# Altium PCB KNX_MCU_8CH_V1.2.PcbDoc
Units mm, origin at the board's own origin, x right, y up, seen from the top; angles counter-clockwise.
Board outline 96.5 x 64.4 mm, 2 copper layers (F.Cu, B.Cu), stack 1.581 mm thick; 102 components, 107 nets, 347 pads, 212 vias.
Unrouted connection lines stored in the file: 62.
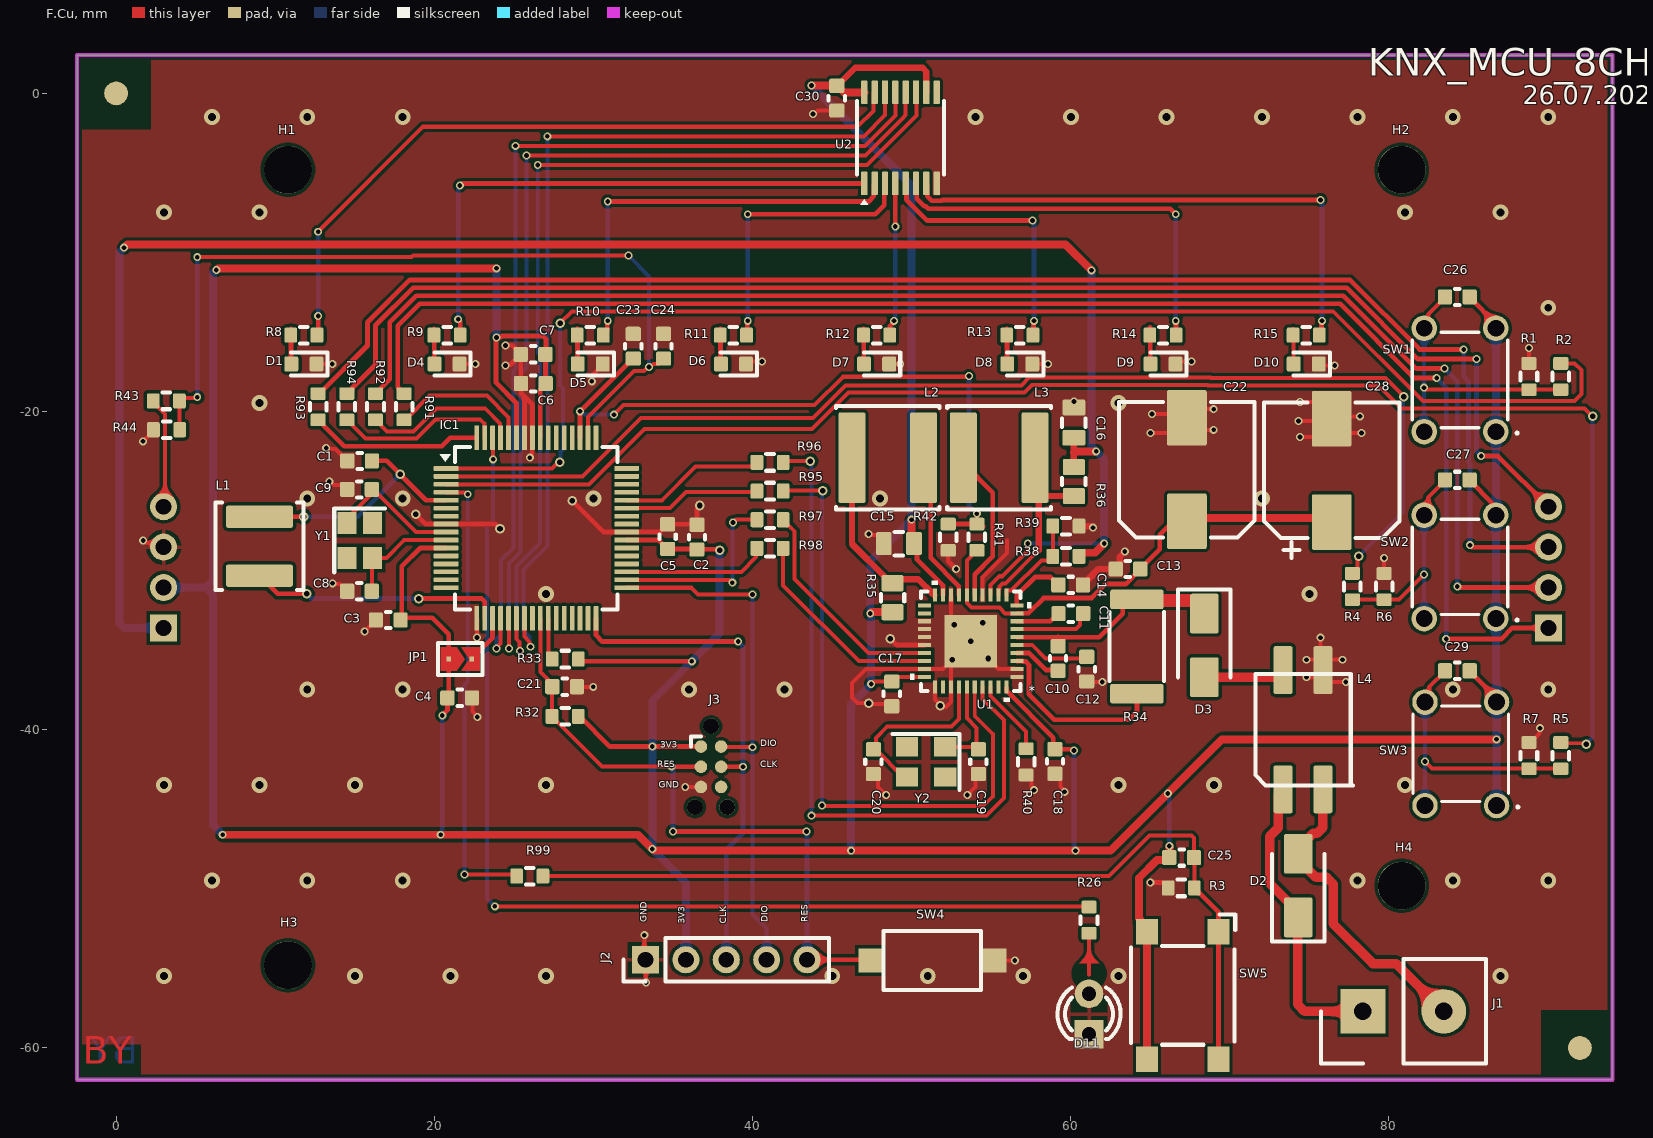
[diagram p0: F.Cu view]
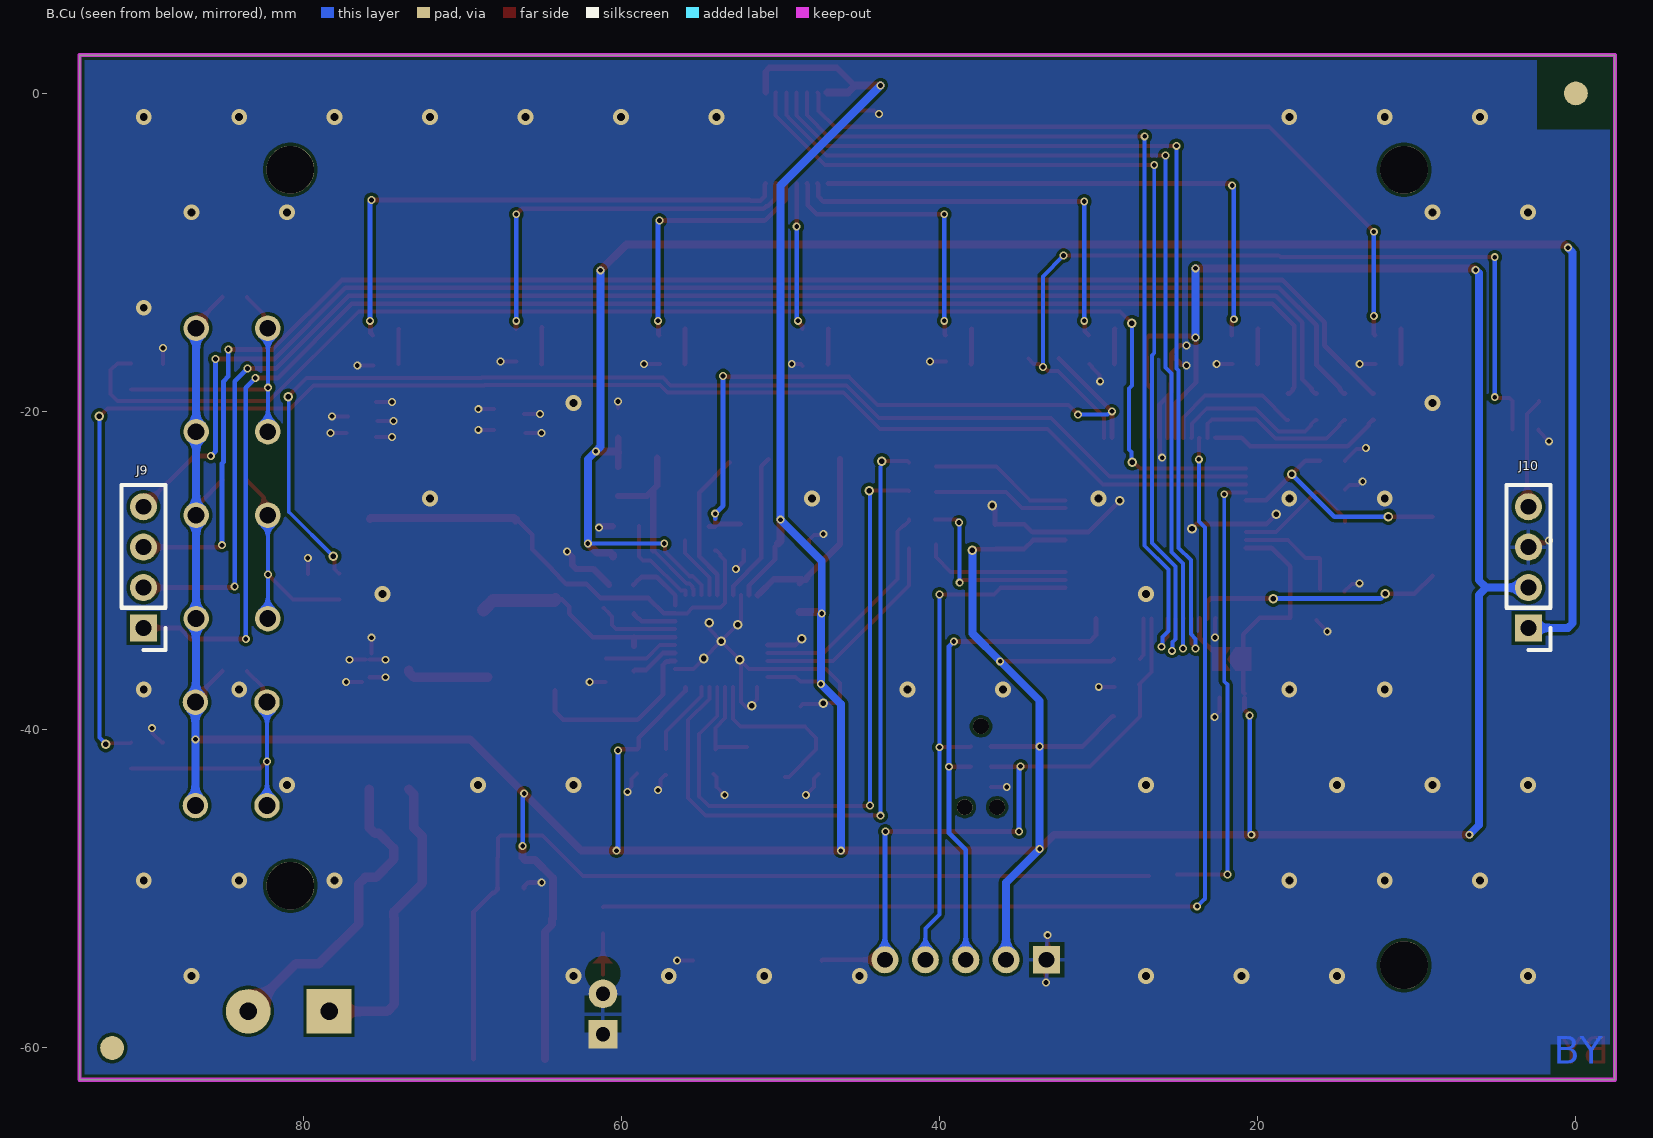
[diagram p1: B.Cu view, seen from below]

## Layer stack, top to bottom
F.Mask: solder mask 0.0102, Solder Resist, Dk 3.5
F.Cu: signal copper 0.0356
Dielectric 1: dielectric 1.51, FR-4, Dk 4.8
B.Cu: signal copper 0.0356
B.Mask: solder mask 0.0102, Solder Resist, Dk 3.5

## Board outline
-2.45,-62 -2.45,2.4 94.05,2.4 94.05,-62

## Design rules (kind name [scope] priority, off if disabled: settings)
Clearance "Clearence 0,5_Polygon" [InNamedPolygon('F.Cu--2') OR InNamedPolygon('B.Cu--2') OR InNamedPolygon('F.Cu--3') OR InNamedPolygon('B.Cu--3')] p1: gap=0.5 ignorepadtopadclearanceinfootprint=FALSE
Clearance "Clearence 0,4_Polygon" [InNamedPolygon('F.Cu--1') OR InNamedPolygon('B.Cu--1')] p2: gap=0.4 ignorepadtopadclearanceinfootprint=FALSE
Clearance "Clearence 0,3_Polygon" [InNamedPolygon('F.Cu-') OR InNamedPolygon('B.Cu-')] p3: gap=0.3 ignorepadtopadclearanceinfootprint=FALSE
Clearance [All] p4: gap=0.2 ignorepadtopadclearanceinfootprint=TRUE
ComponentClearance [All] p1: gap=0 collisioncheckmode=3 verticalgap=0.01 showdistances=FALSE
MinimumSolderMaskSliver [All] p1: minsoldermaskwidth=0
PolygonConnect [All] p1: thpad.connectstyle=Relief thpad.reliefconductorwidth=0.254 thpad.reliefentries=4 thpad.polygonreliefangle="90 Angle" thpad.airgapwidth=0.254 smdpad.connectstyle=Direct smdpad.reliefconductorwidth=0.254 smdpad.reliefentries=4 smdpad.polygonreliefangle="90 Angle" smdpad.airgapwidth=0.254 via.connectstyle=Direct via.reliefconductorwidth=0.254 via.reliefentries=4 via.polygonreliefangle="90 Angle" via.airgapwidth=0.254
PolygonConnect Polygon_B.Cu--3_ConnectRelief90 [IsNamedPolygon('B.Cu--3') vs (IsThruPin or IsSMTPin) and (PadShape_AllLayers <> 'Round')] p2 off: connectstyle=Relief reliefconductorwidth=0.4 reliefentries=4 polygonreliefangle="90 Angle" airgapwidth=0.4
PolygonConnect Polygon_F.Cu--3_ConnectRelief45 [IsNamedPolygon('F.Cu--3') vs (IsThruPin or IsSMTPin) and (PadShape_AllLayers = 'Round')] p3 off: connectstyle=Relief reliefconductorwidth=0.4 reliefentries=4 polygonreliefangle="45 Angle" airgapwidth=0.4
PolygonConnect Polygon_B.Cu--2_ConnectDirect [IsNamedPolygon('B.Cu--2') vs IsVia] p4 off: connectstyle=Direct reliefconductorwidth=0.254 reliefentries=4 polygonreliefangle="90 Angle" airgapwidth=0.254
PolygonConnect Polygon_B.Cu--2_ConnectRelief45 [IsNamedPolygon('B.Cu--2') vs (IsThruPin or IsSMTPin) and (PadShape_AllLayers = 'Round')] p5 off: connectstyle=Relief reliefconductorwidth=0.4 reliefentries=4 polygonreliefangle="45 Angle" airgapwidth=0.4
PolygonConnect Polygon_B.Cu--2_ConnectRelief90 [IsNamedPolygon('B.Cu--2') vs (IsThruPin or IsSMTPin) and (PadShape_AllLayers <> 'Round')] p6 off: connectstyle=Relief reliefconductorwidth=0.4 reliefentries=4 polygonreliefangle="90 Angle" airgapwidth=0.4
PolygonConnect Polygon_F.Cu--2_ConnectDirect [IsNamedPolygon('F.Cu--2') vs IsVia] p7 off: connectstyle=Direct reliefconductorwidth=0.254 reliefentries=4 polygonreliefangle="90 Angle" airgapwidth=0.254
PolygonConnect Polygon_F.Cu--2_ConnectRelief45 [IsNamedPolygon('F.Cu--2') vs (IsThruPin or IsSMTPin) and (PadShape_AllLayers = 'Round')] p8 off: connectstyle=Relief reliefconductorwidth=0.4 reliefentries=4 polygonreliefangle="45 Angle" airgapwidth=0.4
PolygonConnect Polygon_F.Cu--2_ConnectRelief90 [IsNamedPolygon('F.Cu--2') vs (IsThruPin or IsSMTPin) and (PadShape_AllLayers <> 'Round')] p9 off: connectstyle=Relief reliefconductorwidth=0.4 reliefentries=4 polygonreliefangle="90 Angle" airgapwidth=0.4
PolygonConnect Polygon_B.Cu--1_ConnectDirect [IsNamedPolygon('B.Cu--1') vs IsVia] p10 off: connectstyle=Direct reliefconductorwidth=0.254 reliefentries=4 polygonreliefangle="90 Angle" airgapwidth=0.254
PolygonConnect Polygon_B.Cu--1_ConnectRelief45 [IsNamedPolygon('B.Cu--1') vs (IsThruPin or IsSMTPin) and (PadShape_AllLayers = 'Round')] p11 off: connectstyle=Relief reliefconductorwidth=0.4 reliefentries=4 polygonreliefangle="45 Angle" airgapwidth=0.4
PolygonConnect Polygon_B.Cu--1_ConnectRelief90 [IsNamedPolygon('B.Cu--1') vs (IsThruPin or IsSMTPin) and (PadShape_AllLayers <> 'Round')] p12 off: connectstyle=Relief reliefconductorwidth=0.4 reliefentries=4 polygonreliefangle="90 Angle" airgapwidth=0.4
PolygonConnect Polygon_F.Cu--1_ConnectDirect [IsNamedPolygon('F.Cu--1') vs IsVia] p13 off: connectstyle=Direct reliefconductorwidth=0.254 reliefentries=4 polygonreliefangle="90 Angle" airgapwidth=0.254
PolygonConnect Polygon_F.Cu--1_ConnectRelief45 [IsNamedPolygon('F.Cu--1') vs (IsThruPin or IsSMTPin) and (PadShape_AllLayers = 'Round')] p14 off: connectstyle=Relief reliefconductorwidth=0.4 reliefentries=4 polygonreliefangle="45 Angle" airgapwidth=0.4
PolygonConnect Polygon_F.Cu--1_ConnectRelief90 [IsNamedPolygon('F.Cu--1') vs (IsThruPin or IsSMTPin) and (PadShape_AllLayers <> 'Round')] p15 off: connectstyle=Relief reliefconductorwidth=0.4 reliefentries=4 polygonreliefangle="90 Angle" airgapwidth=0.4
PolygonConnect Polygon_B.Cu-_ConnectDirect [IsNamedPolygon('B.Cu-') vs IsVia] p16 off: connectstyle=Direct reliefconductorwidth=0.254 reliefentries=4 polygonreliefangle="90 Angle" airgapwidth=0.254
PolygonConnect Polygon_B.Cu-_ConnectRelief45 [IsNamedPolygon('B.Cu-') vs (IsThruPin or IsSMTPin) and (PadShape_AllLayers = 'Round')] p17 off: connectstyle=Relief reliefconductorwidth=0.3 reliefentries=4 polygonreliefangle="45 Angle" airgapwidth=0.3
PolygonConnect Polygon_B.Cu-_ConnectRelief90 [IsNamedPolygon('B.Cu-') vs (IsThruPin or IsSMTPin) and (PadShape_AllLayers <> 'Round')] p18 off: connectstyle=Relief reliefconductorwidth=0.3 reliefentries=4 polygonreliefangle="90 Angle" airgapwidth=0.3
PolygonConnect Polygon_F.Cu-_ConnectDirect [IsNamedPolygon('F.Cu-') vs IsVia] p19 off: connectstyle=Direct reliefconductorwidth=0.254 reliefentries=4 polygonreliefangle="90 Angle" airgapwidth=0.254
PolygonConnect Polygon_F.Cu-_ConnectRelief45 [IsNamedPolygon('F.Cu-') vs (IsThruPin or IsSMTPin) and (PadShape_AllLayers = 'Round')] p20 off: connectstyle=Relief reliefconductorwidth=0.3 reliefentries=4 polygonreliefangle="45 Angle" airgapwidth=0.3
RoutingVias [All] p1: holewidth=0.711 width=1.27 viastyle="Through Hole" minholewidth=0.711 minwidth=1.27 maxholewidth=0.711 maxwidth=1.27
SilkToSilkClearance [All] p1: silktosilkclearance=0
SilkToSolderMaskClearance [IsPad] p1: minsilkscreentomaskgap=0 clearancetoexposedcopper=TRUE
SolderMaskExpansion [All] p1: expansion=0 istentingtop=FALSE
SupplyNets "Schematic Supply Nets_3" [InNet('+3V3')] p1: voltage=0.000
SupplyNets "Schematic Supply Nets_2" [InNet('GND')] p2: voltage=0.000
SupplyNets "Schematic Supply Nets" [InNet('+12V')] p3: voltage=0.000
Width [All] p1: maxlimit=10 minlimit=0.2 preferedwidth=0.254 minimp=50.000000 maximp=50.000000 favimp=50.000000
26 further rules are at their usual default settings.

## Classes and differential pairs
component class UI_BUTTON_LED: C26 C27 C29 C30 D1 D4 D5 D6 D7 D8 D9 D10 R1 R2 R4 R5 R6 R7 R8 R9 R10 R11 R12 R13 R14 R15 SW1 SW2 SW3 U2
component class "Transceiver for KNx": C10 C11 C12 C13 C14 C15 C16 C17 C18 C19 C20 C22 C28 D2 D3 L2 L3 L4 R34 R35 R36 R38 R39 R40 U1 Y2
component class MCU: C1 C2 C3 C4 C5 C6 C7 C8 C9 C21 IC1 JP1 L1 R32 R33 SW4 Y1
component class KNX-MCU-CONTROL_V0.2: C23 C24 C25 D11 H1 H2 H3 H4 J1 J2 J3 R3 R26 R41 R42 R43 R44 R95 R96 R97 R98 R99 SW5
component class Connectors: J9 J10 R91 R92 R93 R94

## Components (designator, comment, footprint, x,y, rotation, side; value= is the part's Value field where it differs from the comment)
C1 "4.7uF" C_0603_1608METRIC 15.3,-23.1 r0 top
C2 "1uF" C_0603_1608METRIC 36.508,-27.887 r270 top
C3 "100nF" C_0603_1608METRIC 17.1,-33.1 r0 top
C4 "100nF" C_0603_1608METRIC 21.6,-38 r180 top
C5 "100nF" C_0603_1608METRIC 34.668,-27.857 r270 top
C6 "100nF" C_0603_1608METRIC 26.218,-18.237 r0 top
C7 "2.2uF" C_0603_1608METRIC 26.2,-16.4 r0 top
C8 "15pF" C_0603_1608METRIC 15.3,-31.3 r180 top
C9 "15pF" C_0603_1608METRIC 15.3,-24.9 r180 top
C10 "47nF" C_0603_1608METRIC 59.2,-35.525 r90 top
C11 "220nF" C_0603_1608METRIC 60,-32.7 r0 top
C12 "100nF" C_0603_1608METRIC 61,-36.2 r90 top
C13 "100nF" C_0603_1608METRIC 63.6,-29.9 r180 top
C14 "1uF" C_0603_1608METRIC 60,-30.9 r180 top
C15 "10uF" C_0805_2012Metric 49.2,-28.3 r0 top
C16 "10uF" C_0805_2012Metric 60.2,-20.7 r270 top
C17 "100nF" C_0603_1608METRIC 48.747,-37.752 r90 top
C18 "100nF" C_0603_1608METRIC 59,-42 r90 top
C19 "10pF" C_0603_1608METRIC 54.2,-42 r270 top
C20 "10pF" C_0603_1608METRIC 47.6,-42 r270 top
C21 "100nF" C_0603_1608METRIC 28.2,-37.3 r180 top
C22 "100uF" CP_Elec_8x10#1 67.3,-23.65 r90 top
C23 "100nF" C_0603_1608METRIC 32.5,-15.9 r90 top
C24 "100nF" C_0603_1608METRIC 34.4,-15.9 r90 top
C25 "100nF" C_0603_1608METRIC 66.972,-48.043 r180 top
C26 "100nF" C_0603_1608METRIC 84.3,-12.8 r180 top
C27 "100nF" C_0603_1608METRIC 84.3,-24.3 r180 top
C28 "470uf/16V" CP_Elec_8x10#2 76.4,-23.7 r270 top
C29 "100nF" C_0603_1608METRIC 84.3,-36.3 r180 top
C30 "100nF" C_0603_1608METRIC 45.3,-0.3 r270 top
D1 "LED" LED_0603_1608METRIC 11.8,-17.013 r180 top
D2 "SMAJ40CA-HT" D_SMA 74.3,-49.8 r90 top
D3 "SS28" D_SMA 68.4,-34.7 r270 top
D4 "LED" LED_0603_1608METRIC 20.8,-17.013 r180 top
D5 "LED" LED_0603_1608METRIC 29.8,-17.013 r180 top
D6 "LED" LED_0603_1608METRIC 38.8,-17.013 r180 top
D7 "LED" LED_0603_1608METRIC 47.8,-17.013 r180 top
D8 "LED" LED_0603_1608METRIC 56.8,-17.013 r180 top
D9 "LED" LED_0603_1608METRIC 65.8,-17.013 r180 top
D10 "LED" LED_0603_1608METRIC 74.8,-17.013 r180 top
D11 "Led_Green" LED_D3.0MM 61.15,-57.87 r90 top locked
H1 "MountingHole" MOUNTINGHOLE_3MM 10.8,-4.8 r270 top
H2 "MountingHole" MOUNTINGHOLE_3MM 80.8,-4.8 r270 top
H3 "MountingHole" MOUNTINGHOLE_3MM 10.8,-54.8 r270 top
H4 "MountingHole" MOUNTINGHOLE_3MM 80.8,-49.8 r270 top
IC1 "R7FA2L1AB3CFM" LQFP-64_10X10MM_P0.5MM 26.413,-27.327 r0 top locked
J1 "L-KLS8-2170-13" SAMTEC_HPM-02-01-X-S_STRAIGHT_1X02_PITCH5.08MM 78.37,-57.7 r90 top locked
J2 "Conn_01x05" PinHeader_1x05_P2.54mm_Vertical 33.268,-54.457 r90 top
J3 "Conn_ARM_SWD_TagConnect_TC2030-NL" Tag-Connect_TC2030-IDC-NL_2x03_P1.27mm_Vertical 37.393,-42.327 r270 top
J9 "Conn_01x04" PINHEADER_1X04_P2.54MM_VERTICAL 90.036,-33.604 r0 bottom locked
J10 "Conn_01x04" PINHEADER_1X04_P2.54MM_VERTICAL 2.986,-33.604 r0 bottom locked
JP1 "SolderJumper_2_Open" SolderJumper-2_P1.3mm_Open_TrianglePad1.0x1.5mm 21.628,-35.557 r0 top
L1 "4.7uH" L_APV_ANR5012 9.008,-28.467 r270 top
L2 "220uH" L_APV_ANR6028 48.5,-22.9 r180 top
L3 "220uH" L_APV_ANR6028 55.5,-22.9 r0 top
L4 "50474C" L_CommonMode_50474C_7.5x5.9mm 74.6,-40 r90 top
R1 "10k" R_0603_1608METRIC 88.8,-17.8 r90 top
R2 "330R" R_0603_1608METRIC 90.8,-17.8 r270 top
R3 "10K" R_0603_1608METRIC 66.947,-49.943 r0 top
R4 "330R" R_0603_1608METRIC 77.7,-31 r270 top
R5 "330R" R_0603_1608METRIC 90.8,-41.625 r270 top
R6 "10k" R_0603_1608METRIC 79.7,-31 r90 top
R7 "10k" R_0603_1608METRIC 88.8,-41.625 r90 top
R8 "1k" R_0603_1608METRIC 11.8,-15.2 r180 top
R9 "1k" R_0603_1608METRIC 20.8,-15.2 r180 top
R10 "1k" R_0603_1608METRIC 29.8,-15.2 r180 top
R11 "1k" R_0603_1608METRIC 38.8,-15.2 r180 top
R12 "1k" R_0603_1608METRIC 47.8,-15.2 r180 top
R13 "1k" R_0603_1608METRIC 56.8,-15.2 r180 top
R14 "1k" R_0603_1608METRIC 65.8,-15.2 r180 top
R15 "1k" R_0603_1608METRIC 74.8,-15.2 r180 top
R26 "1K" R_0603_1608METRIC 61.15,-51.97 r270 top
R32 "10K" R_0603_1608METRIC 28.218,-39.157 r0 top
R33 "10K" R_0603_1608METRIC 28.228,-35.557 r0 top
R34 "27R" R_2512_6332Metric 64.157,-34.772 r270 top
R35 "1R" R_0805_2012Metric 48.8,-31.7 r270 top
R36 "1R" R_0805_2012Metric 60.2,-24.4 r90 top
R38 "91K" R_0603_1608METRIC 59.7,-29.1 r180 top
R39 "10K" R_0603_1608METRIC 59.7,-27.2 r0 top
R40 "20k" R_0603_1608METRIC 57.197,-42.022 r90 top
R41 "220k" R_0603_1608METRIC 54.1,-27.9 r90 top
R42 "27k" R_0603_1608METRIC 52.3,-27.9 r270 top
R43 "100k" R_0603_1608METRIC 3.152,-19.333 r0 top
R44 "27k" R_0603_1608METRIC 3.172,-21.143 r180 top
R91 "33R" R_0603_1608METRIC 18.1,-19.7 r90 top
R92 "33R" R_0603_1608METRIC 16.3,-19.7 r90 top
R93 "33R" R_0603_1608METRIC 12.7,-19.7 r90 top
R94 "33R" R_0603_1608METRIC 14.5,-19.7 r90 top
R95 "33R" R_0603_1608METRIC 41.1,-25 r180 top
R96 "33R" R_0603_1608METRIC 41.1,-23.2 r180 top
R97 "33R" R_0603_1608METRIC 41.1,-26.8 r180 top
R98 "33R" R_0603_1608METRIC 41.1,-28.6 r180 top
R99 "330R" R_0603_1608METRIC 26,-49.2 r180 top
SW1 "TL1105BF160Q" TL1105 84.468,-18.017 r90 top locked
SW2 "TL1105BF160Q" TL1105 84.468,-29.767 r90 top locked
SW3 "TL1105BF160Q" TL1105 84.518,-41.517 r90 top locked
SW4 "SW_Push" SW_SPST_CK_RS282G05A3 51.3,-54.5 r0 top
SW5 "SW_Push" SW_SPST_OMRON_B3FS-100XP 67.04,-56.7 r270 top locked
U1 "NCN5130MNTWG" QFN40_485AU-01_ONS 53.717,-34.432 r180 top locked
U2 "74HC595PW,118" TSSOP-16_4.4X5MM_P0.65MM 49.3,-2.8 r90 top
Y1 "20Mhz" Crystal_SMD_SeikoEpson_FA238-4Pin_3.2x2.5mm 15.308,-28.102 r270 top
Y2 "16Mhz" Crystal_SMD_SeikoEpson_FA238V-4Pin_3.2x2.5mm 50.907,-42.022 r180 top

## Footprints (in the part's own frame and the unit in brackets; to place one, negate y for a bottom-side part, rotate by r counter-clockwise, add the part's x,y. Pads: shape width x height; smd on the part's side, far side on the other; paste and mask are expansions set on the pad)
C_0603_1608METRIC [mm]
  rrect25% 0.9x0.95 smd mask+0.05: 1(-0.771,-0.005) 2(0.779,-0.005)
  silkscreen extent -0.14,-0.52 0.14,0.5
C_0805_2012Metric [mm]
  rrect25% 1x1.45 smd mask+0.05: 1(-0.95,0) 2(0.95,0)
  silkscreen extent -0.26,-0.73 0.26,0.73
CP_Elec_8x10#1 [mm]
  rrect10% 3.5x2.5 smd mask+0.05: 1(-3.25,0) 2(3.25,0)
  silkscreen extent -4.26,-4.26 4.26,4.26
CP_Elec_8x10#2 [mm]
  rrect10% 3.5x2.5 smd mask+0.05: 1(3.25,0) 2(-3.25,0)
  silkscreen extent -4.26,-4.26 5.5,4.26
Crystal_SMD_SeikoEpson_FA238-4Pin_3.2x2.5mm [mm]
  rect 1.4x1.2 smd mask+0.05: 1(-1.1,-0.8) 2(1.1,0.8) 3(1.1,-0.8) 4(-1.1,0.8)
  silkscreen extent -2,-1.6 2,1.6
Crystal_SMD_SeikoEpson_FA238V-4Pin_3.2x2.5mm [mm]
  rect 1.4x1.2 smd mask+0.05: 1(-1.2,-0.95) 2(1.2,-0.95) 3(1.2,0.95) 4(-1.2,0.95)
  silkscreen extent -2.1,-1.75 2.1,1.75
D_SMA [mm]
  rrect14% 2.5x1.8 smd mask+0.05: 1(-2,0) 2(2,0)
  silkscreen extent -3.51,-1.65 2,1.65
L_APV_ANR5012 [mm]
  rrect18% 1.4x4.2 smd mask+0.05: 1(-1.85,0) 2(1.85,0)
  silkscreen extent -2.76,-2.76 2.76,2.76
L_APV_ANR6028 [mm]
  rrect15% 1.7x5.7 smd mask+0.05: 1(-2.25,0) 2(2.25,0)
  silkscreen extent -3.26,-3.26 3.26,3.26
L_CommonMode_50474C_7.5x5.9mm [mm]
  rrect20% 3x1.2 smd mask+0.05: 1(-3.75,1.25) 2(-3.75,-1.25) 3(3.75,-1.25) 4(3.75,1.25)
  silkscreen extent -3.5,-3.14 3.5,3
LED_0603_1608METRIC [mm]
  rrect25% 0.875x0.95 smd mask+0.05: 1(-0.787,0) 2(0.787,0)
  silkscreen extent -1.49,-0.73 0.8,0.73, body extent -0.86,-0.4 0.74,0.4, height 0.6
LED_D3.0MM [mm]
  rect 1.8x1.8 hole 0.9 mask+0.05: 1(-1.27,0)
  round 1.8 hole 0.9 mask+0.05: 2(1.27,0)
  silkscreen extent -1.56,-1.99 1.67,1.99, body extent -1.6,-1.6 1.6,1.6, height 13
LQFP-64_10X10MM_P0.5MM [mm]
  rrect25% 1.55x0.3 smd mask+0.05: 1(-5.675,3.75) 2(-5.675,3.25) 3(-5.675,2.75) 4(-5.675,2.25) 5(-5.675,1.75) 6(-5.675,1.25) 7(-5.675,0.75) 8(-5.675,0.25) 9(-5.675,-0.25) 10(-5.675,-0.75) 11(-5.675,-1.25) 12(-5.675,-1.75) 13(-5.675,-2.25) 14(-5.675,-2.75) 15(-5.675,-3.25) 16(-5.675,-3.75) 33(5.675,-3.75) 34(5.675,-3.25) 35(5.675,-2.75) 36(5.675,-2.25) 37(5.675,-1.75) 38(5.675,-1.25) 39(5.675,-0.75) 40(5.675,-0.25) 41(5.675,0.25) 42(5.675,0.75) 43(5.675,1.25) 44(5.675,1.75) 45(5.675,2.25) 46(5.675,2.75) 47(5.675,3.25) 48(5.675,3.75)
  rrect25% 0.3x1.55 smd mask+0.05: 17(-3.75,-5.675) 18(-3.25,-5.675) 19(-2.75,-5.675) 20(-2.25,-5.675) 21(-1.75,-5.675) 22(-1.25,-5.675) 23(-0.75,-5.675) 24(-0.25,-5.675) 25(0.25,-5.675) 26(0.75,-5.675) 27(1.25,-5.675) 28(1.75,-5.675) 29(2.25,-5.675) 30(2.75,-5.675) 31(3.25,-5.675) 32(3.75,-5.675) 49(3.75,5.675) 50(3.25,5.675) 51(2.75,5.675) 52(2.25,5.675) 53(1.75,5.675) 54(1.25,5.675) 55(0.75,5.675) 56(0.25,5.675) 57(-0.25,5.675) 58(-0.75,5.675) 59(-1.25,5.675) 60(-1.75,5.675) 61(-2.25,5.675) 62(-2.75,5.675) 63(-3.25,5.675) 64(-3.75,5.675)
  silkscreen extent -6.06,-5.11 5.11,5.11, body extent -6,-6 6,6, height 1.7
MOUNTINGHOLE_3MM [mm]
  round 3 hole 3 mask+0.05: Un1(0,0)
PINHEADER_1X04_P2.54MM_VERTICAL [mm]
  rect 1.7x1.7 hole 1 mask+0.05: 1(0,0)
  round 1.7 hole 1 mask+0.05: 2(0,-2.54) 3(0,-5.08) 4(0,-7.62)
  silkscreen extent -1.38,-9 1.38,1.38, body extent -1.27,-8.98 1.27,1.31, height 15.75
PinHeader_1x05_P2.54mm_Vertical [mm]
  rect 1.7x1.7 hole 1 mask+0.05: 1(0,0)
  round 1.7 hole 1 mask+0.05: 2(0,-2.54) 3(0,-5.08) 4(0,-7.62) 5(0,-10.16)
  silkscreen extent -1.38,-11.54 1.38,1.38
QFN40_485AU-01_ONS [mil]
  rect 32x10 smd mask+1.97: 1(-114,88.58) 2(-114,68.9) 3(-114,49.21) 4(-114,29.53) 5(-114,9.84) 6(-114,-9.84) 7(-114,-29.53) 8(-114,-49.21) 9(-114,-68.9) 10(-114,-88.58) 21(114,-88.58) 22(114,-68.9) 23(114,-49.21) 24(114,-29.53) 25(114,-9.84) 26(114,9.84) 27(114,29.53) 28(114,49.21) 29(114,68.9) 30(114,88.58)
  rect 10x32 smd mask+1.97: 11(-88.58,-114) 12(-68.9,-114) 13(-49.21,-114) 14(-29.53,-114) 15(-9.84,-114) 16(9.84,-114) 17(29.53,-114) 18(49.21,-114) 19(68.9,-114) 20(88.58,-114) 31(88.58,114) 32(68.9,114) 33(49.21,114) 34(29.53,114) 35(9.84,114) 36(-9.84,114) 37(-29.53,114) 38(-49.21,114) 39(-68.9,114) 40(-88.58,114)
  rect 130x130 smd mask+1.97: 41(0,0)
  silkscreen extent -150,-150 150,150
R_0603_1608METRIC [mm]
  rrect25% 0.8x0.95 smd mask+0.05: 1(-0.825,0) 2(0.825,0)
  silkscreen extent -0.24,-0.52 0.24,0.52
R_0805_2012Metric [mm]
  rrect24% 1.025x1.4 smd mask+0.05: 1(-0.913,0) 2(0.913,0)
  silkscreen extent -0.23,-0.73 0.23,0.73
R_2512_6332Metric [mm]
  rrect20% 1.225x3.35 smd mask+0.05: 1(-2.963,0) 2(2.963,0)
  silkscreen extent -2.18,-1.71 2.18,1.71
SAMTEC_HPM-02-01-X-S_STRAIGHT_1X02_PITCH5.08MM [mm]
  rect 2.8x2.8 hole 1.1 mask+0.05: 1(0,0)
  round 2.8 hole 1.1 mask+0.05: 2(0,-5.08)
  silkscreen extent -3.28,-7.73 3.28,2.65, body extent -0.5,-5.58 0.5,0.5, height 15
SolderJumper-2_P1.3mm_Open_TrianglePad1.0x1.5mm [mm]
  rect 0.3x0.3 smd paste-0.3 mask+0.05: 1(-0.725,0) 2(0.725,0)
  F.Cu region: 0.275,0 -0.225,-0.75 -1.225,-0.75 -1.225,0.75 -0.225,0.75
  F.Cu region: 1.225,-0.75 0.075,-0.75 0.575,0 0.075,0.75 1.225,0.75
  silkscreen extent -1.4,-1 1.4,1
SW_SPST_CK_RS282G05A3 [mm]
  rect 1.5x1.5 smd mask+0.05: 1(-3.9,0) 2(3.9,0)
  silkscreen extent -3.06,-1.85 3.06,1.85
SW_SPST_OMRON_B3FS-100XP [mm]
  rect 1.6x1.4 smd mask+0.05: 1(-4,2.25) 1(4,2.25) 2(-4,-2.25) 2(4,-2.25)
  silkscreen extent -5.1,-3.25 3.1,3.3, body extent -3,-3 3,3, height 12
Tag-Connect_TC2030-IDC-NL_2x03_P1.27mm_Vertical [mil]
  round 31 smd paste-31 mask+1.97: 1(-50,-25) 2(-50,25) 3(0,-25) 4(0,25) 5(50,-25) 6(50,25)
  round 39 hole 39 mask+1.97: Un1(-100,0) Un2(100,40) Un3(100,-40)
  silkscreen extent -75,-50 -50,-25
TL1105 [mm]
  round 1.6 hole 1.06: 1(-3.25,-2.25) 2(3.25,-2.25) 3(-3.25,2.25) 4(3.25,2.25)
  silkscreen extent -3.4,-3.64 3,3, body extent -3,-3 3,3, height 20.5
TSSOP-16_4.4X5MM_P0.65MM [mm]
  rrect25% 1.475x0.4 smd mask+0.05: 1(-2.863,2.275) 2(-2.863,1.625) 3(-2.863,0.975) 4(-2.863,0.325) 5(-2.863,-0.325) 6(-2.863,-0.975) 7(-2.863,-1.625) 8(-2.863,-2.275) 9(2.863,-2.275) 10(2.863,-1.625) 11(2.863,-0.975) 12(2.863,-0.325) 13(2.863,0.325) 14(2.863,0.975) 15(2.863,1.625) 16(2.863,2.275)
  silkscreen extent -4.19,-2.74 2.31,2.74

## Part data
C1 C2 C3 C4 C5 C6 C7 C10 C11 C14 C21 C25 C26 C27 C29: library part C_3, Package=C_0603
  C1: MF="Samsung Electro-Mechanics", MP=CL10B475KQ8NQNC, OZD=C1608X7S1A475K080AC
  C2 C14: MF="Samsung Electro-Mechanics", MP=CL10B105KP8NNNC, OZD=CL10B105KP8NNNC
  C3 C4 C5 C6 C21 C25 C26 C27 C29: MF=YAGEO, MP=CC0603KRX7R9BB104
  C7: MF="Samsung Electro-Mechanics", MP=CL10B225KP8NNNC, OZD=CL10B225KP8NNNC
  C10: MF=SAMSUNG, MP=CL10B473KB8NNNC, OZD=CL10B473KB8NNNC
  C11: MF="Samsung Electro-Mechanics", MP=CL10B224KB8NNNC, OZD=CL10B224KB8NNNC
C8 C9 C19 C20: library part 20pF_0402_50V_5%, Package=C0603, MF="Samsung Electro-Mechanics"
  C8 C9: MP=CL10C150JB8NNNC, OZD=CL10C150JB8NNNC
  C19 C20: MP=CL10C100JB8NNNC, OZD=CL10C100JB8NNNC
C12 C13 C17 C18 C23 C24 C30: library part C_1, Package=C_0603
  C12 C13 C17 C18 C23 C24: MF="Samsung Electro-Mechanics", MP=CL10B104KB8NNNC
  C30: MF=YAGEO, MP=CC0603KRX7R9BB104
C15 C16: library part C_3, Package=C_0805, MF="Samsung Electro-Mechanics", MP=CL21B106KOQNNNE, OZD=CL21B106KOQNNNE
C22: library part C_US, Package="Radial D8 L10", MF=SUSCON, MP=CD035M101F10PKKKV00A
C28: library part C_US, OZD=EEEFK1C471P
D1 D4 D5 D6 D7 D8 D9 D10: Package=L_0603, MF=LITEON, MP=LTST-C190KFKT-5A, Sim.Pins="1=K 2=A"
D2: library part D_TVS, Package="DO214AC (SMA)", MF=HOTTECH, MP=SMAJ40CA-HT, OZD=SMAJ40CA-HT
D3: Package="DO214AC (SMA)", MF=HOTTECH, MP=SS18-HT, OZD=SS18-HT
D11: library part LED, Package="Through Hole,D=3mm", MF=TUOZHAN, MP=TZ-L2-03YYBYG1GDJ30-001, OZD=FYL-5014UBC1C-1MA-TR13
IC1: Package=LFQFP-64(10x10), MF=RENESAS, MP=R7FA2L1AB3CFM
J1: library part Screw_Terminal_01x02, Package="THT V/T", MF="KLS ELECTRONIC", MP=L-KLS8-2170-13, OZD=L-KLS8-2170-13
L1 L2 L3: library part L, Package="Non Standard"
  L1: Field6=NRS5030T4R7MMGJV, MF=VIKING, MP=PCD0302MT4R7, OZD=PCD0302MT4R7
  L2 L3: MF="CORE MASTER", MP=NR6028-221M
L4: library part Choke_Wurth_WE-CNSW_744232090, Package=SMD-4P,7x5.9mm, MF=muRata, MP=50474C, OZD=50474C
R1 R2 R4 R5 R6 R7 R8 R9 R10 R11 R12 R13 R14 R15: library part R, Package=R_0603
  R1 R6 R7: MF=FOJAN, MP=FRC0603J103TS
  R2 R4 R5: MF=FOJAN, MP="FRC0603J331 TS"
  R8 R9 R10 R11 R12 R13 R14 R15: MF=YAGEO, MP=RC0603JR-071KL
R3 R32 R33 R38 R39 R40 R41 R42 R43 R44 R91 R92 R93 R94 R95 R96 R97 R98 R99: library part R_US, Package=R_0603
  R3 R32 R33: MF=FOJAN, MP=FRC0603J103TS
  R38: MF=ROYALOHM, MP=0603SAF9102T5E, OZD=0603SAF9102T5E
  R39: MF=ROYALOHM, MP=PS03W4F1002T5E, OZD=PS03W4F1002T5E
  R40: MF=ROYALOHM, MP=0603SAF2002T5E, OZD=0603SAF2002T5E
  R41: MF=PANASONIC, MP=ERJ3EKF2203V
  R42 R44: MF=PANASONIC, MP=ERJ3EKF2702V
  R43: MF=YAGEO, MP=RC0603FR-07100KL
  R91 R92 R93 R94: MF=YAGEO, MP=RC0603JR-0733RL
  R95 R96 R97 R98: MF=ROYALOHM, MP=0603SAF330JT5E, OZD=0603SAF330JT5E
  R99: MF=FOJAN, MP="FRC0603J331 TS"
R26: library part R_7, Package=R0603, MF=VO, MP=SCR0603J1K
R34: library part R_US, Package=R_2512, MF=ROYALOHM, MP=HP122WF270JT4E, OZD=HP122WF270JT4E
R35 R36: library part R_US, Package=R_0805, MF=PANASONIC, MP=ERJ6RQF1R0V, OZD=ERJ6RQF1R0V
SW1 SW2 SW3: "Switch", Manufacturer_Name=E-Switch, Mouser Part Number=612-TL1105B, Datasheet Link=https://configured-product-images.s3.amazonaws.com/2D/specs/TL1105BF160Q.pdf, Manufacturer_Part_Number=TL1105BF160Q, Mouser Price/Stock=https://www.mouser.co.uk/ProductDetail/E-Switch/TL1105BF160Q?qs=YXf4ACKMM4xZnIL%2FJEeFtQ%3D%3D
SW5: Package=SMD,12x12mm, MF=kinghelm, MP=KH-12X12X8H-SMT
U1: Package=QFN-40-EP(6x6), MF=onsemi, MP=NCN5130MNTWG
U2: library part 74HC595, Package=TSSOP-16, MF=Nexperia, MP=74HC595PW,118
Y1: library part Crystal, Package="4-SMD 3225", MF=RALTRON, MP=FL3P2X2P5SSC, OZD=RH100-20.000-10-1010-TR
Y2: library part Crystal, Package=4-SMD, MF=RALTRON, MP=RH100-16.000-10-1010-EXT, OZD=RH100-16.000-10-1010-EXT

## Free pads (board coordinates)
  round 1.5 smd mask+1: 2(0,0) 3(92,-60)
  round 1.5 smd far side mask+1: 4(92,-60) 5(0,0)

## Via types
v1: diameter 0.5, hole 0.3, F.Cu to B.Cu, tented both sides, 135 vias
v2: diameter 1, hole 0.5, F.Cu to B.Cu, tented both sides, 52 vias
v3: diameter 0.6, hole 0.35, F.Cu to B.Cu, tented both sides, 25 vias

## Nets (pads, with @x,y where several pads share a name; then routed paths per layer and width w, separated by ;. In a path a pad name is that pad's centre, name@x,y a point inside that pad or via, vN(x,y) a via of type N, cw(c..) or ccw(c..) an arc to the next point about the centre after c; other vN are vias at no path point)
+3V3: C2.2 C3.2 C4.2 C5.2 C6.2 C7.2 C15.2 C17.2 C18.2 C25.2 C26.1 C27.1 C29.1 C30.1 IC1.11 IC1.39 IC1.56 IC1.59 J2.2 J3.1 J10.2 JP1.1 R32.2 R33.2 R35.2 SW1.1 SW1.2 SW2.1 SW2.2 SW3.1 SW3.2 SW5.2 U1.19 U1.30 U1.40 U2.10 U2.16 | length 378.5
  F.Cu w0.254: v1(15.62,-33.83) 16.312,-33.137 16.312,-33.1 ; 22.4,-37.987 22.4,-38.856 22.7,-39.156 v1(22.7,-39.2) ; v1(47.457,-37.122) 47.602,-36.977 48.747,-36.977 49.042,-36.682 U1.30
  F.Cu w0.3: v1(20.5,-39.1) 20.825,-38.775 C4.2@20.825,-38 ; IC1.11 19.108,-28.577 17.953,-29.732 17.953,-32.957 19.857,-32.957 20.903,-34.003 JP1.1 20.903,-37.652 C4.2@20.818,-37.737 ; IC1.59 25.163,-19.463 23.873,-18.173 23.873,-15.381 v1(23.9,-15.354) 23.938,-15.316 24.19,-15.316 24.251,-15.254 26.838,-15.254 27.013,-15.43 27.013,-16.537 26.993,-16.557 26.993,-18.237 26.663,-18.567 IC1.56 ; R32.2 29.128,-39.157 31.028,-41.057 v1(33.7,-41.057) J3.1 ; R33.2 29.197,-35.7 v1(36.185,-35.7) v1@36.2,-35.7 ; IC1.39 34.113,-28.077 34.668,-28.632 36.478,-28.632 36.508,-28.662 37.773,-28.662 v3@37.828,-28.607 ; C15.2 50.335,-28.485 50.335,-29.299 51.967,-30.931 U1.19 ; U1.40 55.967,-37.561 58.907,-40.501 58.907,-41.132 59,-41.225 60.125,-41.225 v1(60.2,-41.3) ; C29.1@85.075,-36.3 85.075,-36.325 86.768,-38.018 SW3.2 ; C27.1@85.075,-24.3 85.075,-24.325 86.47,-25.72 86.47,-26.268 SW2.2 ; C26.1@85.075,-12.8 85.075,-12.825 86.718,-14.468 SW1.2
  F.Cu w0.4: C30.1@45.3,0.475 45.325,0.475 46.45,1.6 50.691,1.6 50.925,1.366 U2.10
  F.Cu w0.5: v1(6.3,-11.1) 6.4,-11 v1(23.9,-11) ; v1(6.7,-46.6) v1(20.4,-46.6) 32.8,-46.6 v1(33.7,-47.5) 33.8,-47.6 v1(46.2,-47.6) v1(60.3,-47.6) 62.5,-47.6 v1(66.1,-44) 69.5,-40.6 v1(86.768,-40.6) v1@86.8,-40.6 ; v1(43.7,0.5) 45.275,0.5 C30.1@45.3,0.475 ; C30.1@45.325,0.475 45.737,0.062 U2.16 ; v1(47.4,-32.7) 47.487,-32.612 R35.2 ; v1(50,-26.8) 50,-28.15 C15.2 ; SW5.2@64.79,-60.7 64.79,-52.7 64.34,-52.25 64.34,-51.897 64.3,-51.857 64.3,-49.31 65.422,-48.188 66.051,-48.188 66.197,-48.043 v1(66.197,-47.313)
  B.Cu w0.3: v1(20.4,-46.6) 20.5,-46.5 v1(20.5,-39.1) ; v1(60.2,-41.3) 60.2,-47.5 v1(60.3,-47.6) ; v1(66.1,-44) 66.138,-44.038 66.138,-44.18 66.197,-44.238 66.197,-45.686 v1(66.197,-47.313)
  B.Cu w0.5: J10.2 5.636,-31.064 ; v1(6.3,-11.1) 6.1,-11.3 6.1,-30.6 5.636,-31.064 ; v1(6.7,-46.6) 6.1,-46 6.1,-31.527 5.636,-31.064 ; v1(23.9,-15.354) v1(23.9,-11) ; J2.2 35.808,-49.608 v1(33.7,-47.5) v1(33.7,-41.057) 33.7,-38.185 v1(36.185,-35.7) 37.928,-33.957 v3(37.928,-28.707) ; v1(43.7,0.5) 50,-5.8 v1(50,-26.8) 47.4,-29.4 v1(47.4,-32.7) 47.457,-32.757 v1(47.457,-37.122) 46.2,-38.378 v1(46.2,-47.6) ; SW1.2 SW1.1 SW2.2 SW2.1 86.743,-33.042 86.743,-38.242 SW3.2 v1(86.768,-40.6) SW3.1
+12V: C16.2 J10.1 R36.2 R38.1 U1.13 | length 120
  F.Cu w0.254: U1.13 54.967,-30.904 55.518,-30.353 55.708,-30.353 57.253,-28.808 57.253,-28.347 v1(57.3,-28.3)
  F.Cu w0.4: R36.2 60.2,-22.569 C16.2
  F.Cu w0.5: v1(0.5,-9.7) 0.7,-9.5 59.675,-9.5 v1(61.3,-11.125) ; 60.2,-22.569 60.269,-22.5 v1(61.6,-22.5) ; R38.1 60.525,-29.025 60.675,-28.875 61.525,-28.875 v1(62.1,-28.3)
  B.Cu w0.254: v1(57.3,-28.3) v1(62.1,-28.3)
  B.Cu w0.5: v1(0.5,-9.7) 0.2,-10 0.2,-33.3 0.504,-33.604 J10.1 ; v1(61.3,-11.125) 61.3,-22.2 v1(61.6,-22.5) 62.1,-23 v1(62.1,-28.3)
-A: D2.2 J1.2 L4.2 | length 19.8
  F.Cu w0.6: L4.2 75.85,-46.15 75.499,-46.501 75.249,-46.501 74.3,-47.45 D2.2 74.3,-48.15 75.426,-49.276 76.076,-49.276 76.5,-49.7 76.5,-52.2 79,-54.7 80.45,-54.7 J1.2
A: D2.1 J1.1 L4.1 | length 18.9
  F.Cu w0.6: L4.1 73.05,-44.05 73.05,-46.15 72.5,-46.7 72.5,-49.65 74.3,-51.45 D2.1 74.269,-51.831 74.269,-57.269 74.7,-57.7 J1.1
BTN_DOWN: IC1.3 R5.1 | length 97.9
  F.Cu w0.25: IC1.3 29.723,-24.577 33.2,-21.1 43.736,-21.1 46.036,-18.8 57.1,-18.8 57.575,-18.325 68.611,-18.325 68.636,-18.35 79.35,-18.35 80.8,-19.8 92.3,-19.8 v3(92.8,-20.3) ; R5.1 90.85,-40.85 92.35,-40.85 v3(92.4,-40.9)
  B.Cu w0.25: v3(92.4,-40.9) 92.8,-40.5 v3(92.8,-20.3)
BTN_ENTER: IC1.2 R4.1 | length 75.8
  F.Cu w0.25: IC1.2 29.323,-24.077 33,-20.4 43.8,-20.4 45.85,-18.35 56.914,-18.35 57.389,-17.875 68.798,-17.875 68.823,-17.9 79.784,-17.9 v3(80.942,-19.058) ; R4.1 77.758,-30.175 78.033,-29.9 78.033,-29.167 v3(78.1,-29.1)
  B.Cu w0.25: v3(78.1,-29.1) 80.9,-26.3 80.9,-19.1 v3(80.942,-19.058)
BTN_UP: IC1.1 R2.1 | length 86.2
  F.Cu w0.25: IC1.1 27.403,-23.577 27.78,-23.2 v3(27.875,-23.2) ; v3(27.904,-14.444) 28.647,-13.7 76.5,-13.7 82.15,-19.35 91.65,-19.35 92.1,-18.9 92.1,-17.4 91.675,-16.975 R2.1
  B.Cu w0.25: v3(27.875,-23.2) 27.942,-23.133 27.942,-22.558 28.1,-22.4 28.1,-18.567 27.904,-18.371 v3(27.904,-14.444)
CLK: IC1.32 J2.3 J3.4 | length 32.1
  F.Cu w0.3: IC1.32 30.163,-34.063 30.557,-34.457 v1(39.1,-34.457) ; J3.4 v1(39.393,-42.327)
  B.Cu w0.3: J2.3 38.348,-47.552 39.393,-46.507 v1(39.393,-42.327) 39.393,-34.75 v1(39.1,-34.457)
DIO: IC1.33 J2.4 J3.2 | length 33.4
  F.Cu w0.254: IC1.33 36.157,-31.077 36.58,-31.5 v1(40,-31.5) ; J3.2 38.05,-41.078 39.978,-41.078 v1(40,-41.1)
  B.Cu w0.254: v1(40,-31.5) v1(40,-41.1) 40,-51.6 40.888,-52.488 J2.4
EXTAL: C8.1 IC1.10 Y1.2 | length 7.1
  F.Cu w0.25: C8.1@16.083,-31.147 16.083,-29.227 Y1.2 16.983,-29.202 18.108,-28.077 IC1.10
GND: C1.1 C2.1 C3.1 C4.1 C5.1 C6.1 C7.1 C8.2 C9.2 C12.1 C13.1 C14.1 C15.1 C16.1 C17.1 C18.1 C19.2 C20.2 C21.1 C22.2 C23.1 C24.1 C28.2 C30.2 D1.1 D4.1 D5.1 D6.1 D7.1 D8.1 D9.1 D10.1 D11.1 IC1.8 IC1.17 IC1.40 IC1.57 IC1.58 J2.1 J3.5 J10.3 L4.3 R1.2 R3.1 R6.2 R7.2 R39.2 R40.1 R42.2 R44.2 SW4.2 U1.1 U1.2 U1.14 U1.18 U1.23 U1.24 U1.25 U1.26 U1.29 U1.31 U1.33 U1.41 U2.8 | length 112.1
  F.Cu w0.25: C20.2@47.6,-42.775 47.9,-43.075 47.9,-43.6 v1(48.4,-44.1) ; v1(53.5,-44.1) 54,-43.6 54,-42.975 C19.2@54.2,-42.775
  F.Cu w0.254: v1(1.692,-21.873) 2.359,-21.206 R44.2@2.359,-21.143 ; v1(1.7,-28.1) 1.767,-28.1 1.914,-28.247 2.722,-28.247 J10.3@2.998,-28.524 ; D1.1 v1(13.587,-17.013) ; v1(13.4,-24.4) 13.467,-24.4 13.694,-24.627 14.24,-24.627 C9.2@14.513,-24.9 ; v1(13.6,-30.8) 13.647,-30.847 14.085,-30.847 14.19,-30.952 14.202,-30.952 14.538,-31.288 C8.2@14.538,-31.3 ; D4.1@21.575,-17.013 v1(22.575,-17.013) v1@22.587,-17 ; IC1.17@22.663,-32.989 22.669,-32.995 22.669,-34.194 v1(22.675,-34.2) ; v1(26,-22.9) 26,-22.833 26.14,-22.693 26.14,-21.662 IC1.57@26.163,-21.639 ; v1(29.9,-18.1) 29.947,-18.053 29.947,-17.69 30.41,-17.227 30.41,-17.177 D5.1@30.575,-17.013 ; v1@33.187,-52.9 v1(33.2,-52.913) J2.1@33.2,-53.913 ; J2.1@33.3,-54.887 v1(33.3,-55.887) v1@33.313,-55.9 ; v1@35.758,-43.609 v1(35.771,-43.597) J3.5@36.771,-43.597 ; D6.1@39.588,-16.863 v1(40.587,-16.863) v1@40.6,-16.85 ; v1(43.8,-1.3) 43.9,-1.3 44.125,-1.075 C30.2@45.3,-1.075 ; v1(47.3,-27.7) 47.347,-27.747 47.877,-27.747 48.2,-28.07 C15.1@48.2,-28.313 ; D7.1@48.6,-17.125 48.713,-17.013 v1(49.285,-17.013) ; C17.1@48.747,-38.527 48.609,-38.388 47.374,-38.388 v3(47.312,-38.327) 47.307,-38.322 46.607,-38.322 46.257,-37.972 46.257,-37.072 47.147,-36.182 U1.29 51.967,-36.182 U1.41@52.467,-35.682 ; U1.31 51.467,-38.109 51.8,-38.442 v3(51.8,-38.5) ; v3@51.8,-38.572 52.157,-38.572 52.467,-38.262 U1.33 U1.41@52.467,-35.682 ; U1.18 52.467,-33.182 v3(52.682,-33.397) v3(53.717,-34.432) ; v3(54.467,-33.272) 54.467,-33.682 v3(53.717,-34.432) ; U1.14 54.467,-30.433 54.9,-30 56,-28.9 56,-28.1 ; SW4.2@55.487,-54.5 v1(56.487,-54.5) v1@56.5,-54.487 ; U1.2 55.467,-36.182 v3(54.807,-35.522) v3(53.717,-34.432) ; R40.1@57.197,-42.834 57.259,-42.834 57.545,-43.12 57.545,-43.578 57.7,-43.733 v1(57.7,-43.8) ; D8.1@57.575,-17.013 v1(58.575,-17.013) v1@58.587,-17 ; C18.1@59,-42.762 59.012,-42.762 59.348,-43.098 59.348,-43.581 59.6,-43.833 v1(59.6,-43.9) ; C16.1@60.2,-19.763 v1(60.2,-19.375) ; v1@65,-21.362 v1(65.013,-21.35) 66.013,-21.35 ; v1@65.1,-20.162 v1(65.113,-20.15) C22.2@66.113,-20.15 ; D9.1@66.588,-16.863 v1(67.587,-16.863) v1@67.6,-16.85 ; C22.2@67.987,-21.15 v1(68.987,-21.15) v1@69,-21.137 ; C22.2@67.987,-19.85 v1(68.987,-19.85) v1@69,-19.837 ; v1@74.3,-20.613 v1(74.313,-20.6) C28.2@75.313,-20.6 ; v1@74.4,-21.612 v1(74.413,-21.6) C28.2@75.413,-21.6 ; v1@74.4,-19.413 v1(74.413,-19.4) C28.2@75.413,-19.4 ; v1@74.8,-36.712 v1(74.813,-36.7) L4.3@75.813,-36.7 ; v1@74.8,-35.613 v1(74.813,-35.6) L4.3@75.813,-35.6 ; D10.1@75.588,-17.113 v1(76.587,-17.113) v1@76.6,-17.1 ; v1@75.687,-34.2 v1(75.7,-34.213) L4.3@75.7,-35.213 ; L4.3@76.087,-35.6 v1(77.087,-35.6) v1@77.1,-35.587 ; L4.3@76.287,-37 v1(77.287,-37) v1@77.3,-36.987 ; C28.2@77.187,-20.3 v1(78.187,-20.3) v1@78.2,-20.287 ; C28.2@77.271,-21.351 v1(78.271,-21.351) v1@78.284,-21.338 ; v1@79.687,-29.2 v1(79.7,-29.213) R6.2@79.7,-30.212 ; v1@88.787,-16 v1(88.8,-16.013) R1.2@88.8,-17.013 ; R7.2@88.8,-40.813 88.862,-40.813 89.453,-40.222 89.453,-39.947 v1(89.5,-39.9) ; U1.41@52.467,-35.682 v3(52.542,-35.607) v3(53.717,-34.432)
  F.Cu w0.3: v3(18.828,-26.457) 19.448,-27.077 IC1.8 23.848,-27.077 v3(24.128,-27.357) ; v1(24.473,-17.1) 24.511,-17.062 24.788,-17.062 25.425,-16.425 C7.1@25.425,-16.4 ; v1(24.473,-15.854) 24.489,-15.838 24.888,-15.838 25.425,-16.375 C7.1@25.425,-16.4 ; IC1.58 25.663,-19.042 ; IC1.57 26.163,-19.542 25.663,-19.042 ; v3(28.678,-25.607) 30.648,-27.577 IC1.40 34.173,-27.577 34.668,-27.082 36.478,-27.082 36.508,-27.112 36.508,-26.077 v3(36.678,-25.907) ; v3(48.657,-34.272) 49.067,-34.682 U1.26 ; R42.2 52.3,-29.4 v1(52.8,-29.9) ; v1(65,-49.6) 65.778,-49.6 65.797,-49.618 65.872,-49.618 66.122,-49.868 R3.1 ; C7.1@25.425,-16.4 25.434,-16.409 25.434,-18.228 25.443,-18.237 25.443,-18.822 25.663,-19.042
  F.Cu w0.4: R39.2 61.3,-27.2 v1(61.4,-27.3) ; C14.1@60.775,-30.9 60.775,-30.875 61.75,-29.9 62.825,-29.9 63.075,-29.65 63.075,-29.125 v1(63.4,-28.8)
  other v2: 3.014,-55.476 15.014,-55.476 21.014,-55.476 27.014,-55.476 45.014,-55.476 51.014,-55.476 57.014,-55.476 63.014,-55.476 87.014,-55.476 6.014,-49.476 12.014,-49.476 18.014,-49.476 78.014,-49.476 84.014,-49.476 90.014,-49.476 3.014,-43.476 9.014,-43.476 15.014,-43.476 27.014,-43.476 63.014,-43.476 69.014,-43.476 81.014,-43.476 12.014,-37.476 18.014,-37.476 36.014,-37.476 42.014,-37.476 84.014,-37.476 27.014,-31.476 75.014,-31.476 12.014,-25.476 18.014,-25.476 30.014,-25.476 48.014,-25.476 72.014,-25.476 9.014,-19.476 63.014,-19.476 90.014,-13.476 3.014,-7.476 9.014,-7.476 81.014,-7.476 87.014,-7.476 6.014,-1.476 12.014,-1.476 18.014,-1.476 54.014,-1.476 60.014,-1.476 66.014,-1.476 72.014,-1.476 78.014,-1.476 84.014,-1.476 90.014,-1.476
Led_Shift_O\E\: IC1.20 U2.13 | length 60.2
  F.Cu w0.25: v1(23.9,-34.9) 23.9,-34.832 24.163,-34.569 IC1.20 ; v1(25.1,-3.3) 47.064,-3.3 48.975,-1.389 U2.13
  B.Cu w0.25: v1(23.9,-34.9) 23.9,-34.29 24.2,-33.99 24.2,-29.337 24.971,-28.566 24.971,-17.415 25.1,-17.286 v1(25.1,-3.3)
Led_ShiftReg_Latch: IC1.21 U2.12 | length 59.7
  F.Cu w0.25: 49.427,-1.573 49.625,-1.375 U2.12
  F.Cu w0.254: IC1.21 24.682,-33.02 24.682,-34.882 v1(24.7,-34.9) ; v1(25.8,-3.9) 47.103,-3.9 49.427,-1.576 49.427,-1.573
  B.Cu w0.254: v1(24.7,-34.9) 24.7,-29.545 25.423,-28.822 25.423,-17.602 25.8,-17.225 v1(25.8,-3.9)
Led_ShiftRegCLK: IC1.22 U2.11 | length 60
  F.Cu w0.25: IC1.22 25.163,-34.3 25.339,-34.475 25.339,-34.989 v1(25.386,-35.037) ; v1(26.5,-4.5) 47.2,-4.5 50.3,-1.4 50.3,0.037 U2.11
  B.Cu w0.25: v1(25.386,-35.037) 25.339,-34.989 25.339,-34.475 25.163,-34.3 25.163,-29.737 26.65,-28.25 26.65,-16.484 26.5,-16.334 v1(26.5,-4.5)
Led_ShiftRegDATA: IC1.23 U2.14 | length 58
  F.Cu w0.25: IC1.23 25.663,-34.152 25.991,-34.48 25.991,-34.737 v1(26.039,-34.785) ; v1(27.1,-2.7) 47,-2.7 48.325,-1.375 U2.14
  B.Cu w0.25: v1(26.039,-34.785) 25.991,-34.737 25.991,-34.178 25.613,-33.8 25.613,-29.923 27.1,-28.436 v1(27.1,-2.7)
NetC1_2: C1.2 IC1.5 L1.1 | length 17.4
  F.Cu w0.254: v1(13.2,-22.3) 13.247,-22.347 13.797,-22.347 14.525,-23.075 14.525,-23.113
  F.Cu w0.3: L1.1 11.768,-26.617 v3(11.778,-26.607) ; C1.2@16.075,-23.1 17,-23.1 v3(17.85,-23.95) ; v3@17.78,-23.88 19.477,-25.577 IC1.5
  B.Cu w0.3: v3(11.778,-26.607) 15.193,-26.607 v3(17.85,-23.95)
NetC10_1: C10.1 U1.4 | length 3.1
  F.Cu w0.3: U1.4 57.382,-35.182 58.451,-36.251 59.151,-36.251 C10.1@59.2,-36.3
NetC10_2: C10.2 D3.1 R34.1 U1.6 | length 14.1
  F.Cu w0.3: U1.6 61.784,-34.182 63.27,-32.696 63.27,-32.272 63.733,-31.809 R34.1
  F.Cu w0.4: 59.199,-34.207 59.2,-34.208 C10.2@59.2,-34.725
  F.Cu w0.8: R34.1 64.219,-31.872 68.057,-31.872 68.643,-32.457 D3.1@68.657,-32.472
NetC11_1: C11.1 U1.8 | length 2.8
  F.Cu w0.3: U1.8 58.718,-33.182 58.875,-33.025 58.925,-33.025 59.2,-32.75 C11.1@59.2,-32.7
NetC11_2: C11.2 U1.7 | length 5.4
  F.Cu w0.25: U1.7 60.318,-33.682 60.596,-33.404 60.596,-32.879 C11.2@60.775,-32.7 ; C11.2@60.775,-32.675 61.1,-32.35 C11.2@61.125,-32.35
NetC12_2: C12.2 U1.5 | length 5.7
  F.Cu w0.25: U1.5 57.582,-34.682 58.425,-35.525 C12.2@60.975,-35.525
  F.Cu w0.254: 60.987,-37 v1(61.987,-37) v1@62,-36.987
NetC14_2: C14.2 U1.10 | length 3.9
  F.Cu w0.3: U1.10 56.613,-31.562 57.775,-30.4 58.725,-30.4 58.9,-30.575 58.925,-30.575 59.225,-30.875 C14.2@59.225,-30.9
NetC25_1: C25.1 R3.2 R99.1 SW5.1 | length 57.5
  F.Cu w0.25: R99.1 62.4,-49.2 64.953,-46.647 67.6,-46.647 67.747,-46.793 67.747,-48.043 67.772,-48.068 R3.2 ; R3.2@68.097,-50.268 68.693,-50.865
  F.Cu w0.3: R3.2 67.772,-50.018 68.022,-50.268 68.097,-50.268 68.693,-50.865 69.29,-51.462 69.29,-52.7 SW5.1@69.29,-60.7
NetC26_2: C26.2 R1.1 R2.2 SW1.3 SW1.4 | length 17.7
  F.Cu w0.254: v1(82.2,-18.5) 82.325,-18.625 R1.1 R2.2 ; SW1.4 82.476,-14.509 82.476,-13.874 83.525,-12.825 C26.2@83.525,-12.8
  B.Cu w0.254: SW1.3 82.209,-21.258 82.209,-18.509 v1(82.2,-18.5) 82.209,-18.491 82.209,-14.776 SW1.4
NetC27_2: C27.2 R4.2 R6.1 SW2.3 SW2.4 | length 14.4
  F.Cu w0.254: R4.2 R6.1 80.625,-31.825 v1(82.209,-30.241) ; SW2.4 82.476,-26.259 82.476,-25.374 83.525,-24.325 C27.2@83.525,-24.3
  B.Cu w0.254: SW2.3@82.218,-32.999 82.218,-30.25 v1(82.209,-30.241) 82.218,-30.232 SW2.4
NetC29_2: C29.2 R5.2 R7.1 SW3.3 SW3.4 | length 17.7
  F.Cu w0.254: v1(82.259,-41.991) 82.718,-42.45 R7.1 R5.2 ; SW3.4 82.526,-38.009 82.526,-37.324 83.525,-36.325 C29.2@83.525,-36.3
  B.Cu w0.254: SW3.3@82.268,-44.749 82.268,-42 v1(82.259,-41.991) 82.268,-41.982 SW3.4
NetD1_2: D1.2 R8.2 | length 2.2
  F.Cu w0.3: R8.2@10.975,-14.9 R8.2@10.994,-14.919 ; R8.2@10.994,-14.819 10.994,-16.994 D1.2
NetD3_2: D3.2 L4.4 | length 5.2
  F.Cu w0.6: D3.2 73.05,-36.7 73.35,-36.4 L4.4
NetD4_2: D4.2 R9.2 | length 2.2
  F.Cu w0.3: R9.2@19.975,-14.8 19.994,-14.819 19.994,-16.994 D4.2
NetD5_2: D5.2 R10.2 | length 2.2
  F.Cu w0.3: R10.2@28.975,-14.8 28.994,-14.819 28.994,-16.994 D5.2
NetD6_2: D6.2 R11.2 | length 2.2
  F.Cu w0.3: R11.2@37.975,-14.8 37.994,-14.819 37.994,-16.994 D6.2
NetD7_2: D7.2 R12.2 | length 2.2
  F.Cu w0.3: R12.2@46.975,-14.8 46.994,-14.819 46.994,-16.994 D7.2
NetD8_2: D8.2 R13.2 | length 2.2
  F.Cu w0.3: R13.2@55.975,-14.8 55.994,-14.819 55.994,-16.994 D8.2
NetD9_2: D9.2 R14.2 | length 2.2
  F.Cu w0.3: 64.975,-14.7 64.994,-14.719 R14.2@64.994,-15.2 ; R14.2@64.994,-15.3 64.994,-16.994 D9.2
NetD10_2: D10.2 R15.2 | length 2.2
  F.Cu w0.254: R15.2@73.975,-14.8 73.994,-14.819 73.994,-16.994 D10.2
NetD11_2: D11.2 R26.2 | length 2.6
  F.Cu w0.25: 61.15,-55.4 R26.2
NetJ9_1: J9.1 R91.2 | length 95.7
  F.Cu w0.3: R91.2 18.025,-18.875 17.775,-18.625 17.775,-18.55 17.7,-18.475 17.7,-14.607 19.082,-13.225 76.929,-13.225 81.604,-17.9 v1(83,-17.9) ; v1(83.6,-34.3) 87.062,-34.3 87.758,-33.604 J9.1
  B.Cu w0.3: v1(83,-17.9) 83,-17.902 83.6,-18.502 v1(83.6,-34.3)
  other v2: 90.014,-37.476
NetJ9_2: J9.2 R92.2 | length 93.6
  F.Cu w0.3: R92.2 16.375,-18.875 16.625,-18.625 16.625,-18.55 17.2,-17.975 17.2,-14.4 18.875,-12.725 77.136,-12.725 81.711,-17.3 v1(83.5,-17.3) ; v1(84.3,-31) 84.364,-31.064 J9.2
  B.Cu w0.3: v1(83.5,-17.3) 84.3,-18.1 v1(84.3,-31)
NetJ9_3: J9.3 R93.2 | length 95.1
  F.Cu w0.3: R93.2 12.775,-18.875 15.8,-15.85 15.8,-14.386 18.461,-11.725 77.55,-11.725 81.925,-16.1 v1(84.7,-16.1) ; v1(85.1,-28.4) 85.224,-28.524 J9.3
  B.Cu w0.3: v1(84.7,-16.1) 84.7,-17.793 85,-18.093 85,-23.169 85.1,-23.269 v1(85.1,-28.4)
NetJ9_4: J9.4 R94.2 | length 88.9
  F.Cu w0.3: R94.2 14.575,-18.875 14.825,-18.625 14.825,-18.55 16.3,-17.075 16.3,-14.593 18.668,-12.225 77.343,-12.225 81.818,-16.7 v1(85.5,-16.7) ; v1(85.8,-22.8) 86.852,-22.8 J9.4
  B.Cu w0.3: v1(85.5,-16.7) 85.5,-22.5 v1(85.8,-22.8)
NetJP1_2: IC1.19 JP1.2 | length 3.1
  F.Cu w0.3: JP1.2 22.648,-35.262 22.648,-35.237 23.663,-34.222 IC1.19
NetL1_2: IC1.18 L1.2 | length 15.9
  F.Cu w0.3: L1.2 10.148,-31.457 v3(11.978,-31.457) ; v3(19.028,-31.757) 22.978,-31.757 23.163,-31.942 IC1.18
  B.Cu w0.3: v3(11.978,-31.457) 12.278,-31.757 v3(19.028,-31.757)
NetL2_1: L2.1 U1.17 | length 9.5
  F.Cu w0.3: L2.1@50.75,-23 51.2,-23.45 51.2,-29.2 52.967,-30.967 U1.17
NetL2_2: L2.2 R35.1 U1.20 | length 12.1
  F.Cu w0.4: L2.2@46.25,-23 46.25,-28.325 48.3,-30.375 48.3,-30.475 48.414,-30.589 48.602,-30.589 R35.1 ; R35.1@48.646,-30.545 50.425,-30.545 51.315,-31.434 ; 51.315,-31.434 U1.20@51.417,-31.536
NetL3_1: L3.1 U1.15 | length 9.6
  F.Cu w0.3: L3.1@53.2,-23.2 55.1,-25.1 55.1,-29.11 53.967,-30.243 U1.15
NetL3_2: L3.2 R36.1 U1.12 | length 12.3
  F.Cu w0.25: U1.12 55.469,-31.534 55.469,-31.157 55.513,-31.113 55.513,-30.997 55.705,-30.805 55.895,-30.805 57.99,-28.71
  F.Cu w0.4: L3.2 57.75,-24.662 L3.2@57.99,-24.902 ; 57.99,-28.71 L3.2@57.99,-24.902 ; R36.1 58.4,-25.312 L3.2@57.99,-24.902
NetR8_1: R8.1 U2.15 | length 45.8
  F.Cu w0.254: v1(12.7,-8.7) 19.3,-2.1 46.6,-2.1 47.6,-1.1 47.6,-0.013 U2.15
  F.Cu w0.3: R8.1 12.7,-15.125 v1(12.7,-14)
  B.Cu w0.3: v1(12.7,-14) v1(12.7,-8.7)
NetR9_1: R9.1 U2.1 | length 35
  F.Cu w0.3: v1(21.5,-14.2) 21.625,-14.325 R9.1 ; v1(21.6,-5.8) 21.654,-5.8 21.792,-5.663 U2.1
  B.Cu w0.3: v1(21.5,-14.2) 21.5,-5.954 21.6,-5.854 v1(21.6,-5.8)
NetR10_1: R10.1 U2.2 | length 26.2
  F.Cu w0.3: R10.1 30.875,-14.95 30.875,-14.325 v1(30.9,-14.3) ; v1(30.9,-6.8) 47.291,-6.8 47.625,-6.466 47.625,-5.713 U2.2
  B.Cu w0.3: v1(30.9,-14.3) v1(30.9,-6.8)
NetR11_1: R11.1 U2.3 | length 17.8
  F.Cu w0.3: R11.1 39.662,-15.162 39.662,-14.337 v1(39.7,-14.3) ; v1(39.7,-7.6) 47.7,-7.6 48.275,-7.025 48.275,-5.713 U2.3
  B.Cu w0.3: v1(39.7,-14.3) v1(39.7,-7.6)
NetR12_1: R12.1 U2.4 | length 9.3
  F.Cu w0.3: R12.1@48.625,-14.8 48.625,-14.629 48.9,-14.354 v1(48.9,-14.3) ; v1(48.975,-8.375) U2.4
  B.Cu w0.3: v1(48.9,-14.3) 48.9,-14.246 48.975,-14.171 v1(48.975,-8.375)
NetR13_1: R13.1 U2.5 | length 16.8
  F.Cu w0.3: U2.5 49.675,-5.713 49.675,-6.688 50.987,-8 v1(57.6,-8) ; R13.1 57.662,-15.163 57.662,-14.337 v1(57.7,-14.3)
  B.Cu w0.3: v1(57.6,-8) 57.6,-8.054 57.7,-8.154 v1(57.7,-14.3)
NetR14_1: R14.1 U2.6 | length 24.9
  F.Cu w0.3: U2.6 50.325,-5.713 50.325,-6.631 50.794,-7.1 50.902,-7.1 51.052,-7.25 66.25,-7.25 v1(66.6,-7.6) ; v1(66.6,-14.3) 66.625,-14.325 R14.1@66.625,-14.8
  B.Cu w0.3: v1(66.6,-14.3) v1(66.6,-7.6)
NetR15_1: R15.1 U2.7 | length 34.3
  F.Cu w0.3: U2.7 50.975,-5.713 50.975,-6.466 51.259,-6.75 51.891,-6.75 51.941,-6.7 v1(75.7,-6.7) ; R15.1 75.762,-15.063 75.762,-14.338 v1(75.8,-14.3)
  B.Cu w0.3: v1(75.7,-6.7) 75.7,-6.754 75.8,-6.854 v1(75.8,-14.3)
NetR34_2: R34.2 U1.3 | length 11.7
  F.Cu w0.3: U1.3 56.966,-35.682 56.989,-35.705 57.164,-35.705 57.369,-35.91 57.369,-37.769 58.972,-39.372 63.657,-39.372 64.157,-38.872 R34.2@64.157,-37.514
NetR38_2: R38.2 R39.1 U1.11 | length 6
  F.Cu w0.25: U1.11 55.967,-31.257 55.969,-31.255 56.248,-31.255 58.153,-29.35 58.625,-29.35 R38.2 R39.1
NetR40_2: R40.2 U1.38 | length 4.8
  F.Cu w0.25: U1.38 54.967,-37.882 57.197,-40.112 R40.2
P000: IC1.64 R93.1 | length 10.9
  F.Cu w0.3: R93.1 12.775,-20.525 13.025,-20.775 13.025,-20.85 14.35,-22.175 20.479,-22.175 21.002,-21.652 IC1.64
P001: IC1.63 R94.1 | length 10.7
  F.Cu w0.25: R94.1 14.575,-20.525 14.85,-20.8 14.85,-20.875 15.675,-21.7 18.873,-21.7 20.073,-20.5 22.874,-20.5 23.138,-20.764 23.138,-21.627 IC1.63
P003: IC1.61 R92.1 | length 10.1
  F.Cu w0.25: R92.1 16.375,-20.525 16.65,-20.8 16.65,-20.875 17.025,-21.25 18.686,-21.25 20.136,-19.8 23.2,-19.8 24.138,-20.738 24.138,-21.627 IC1.61
P004: IC1.60 R91.1 | length 9
  F.Cu w0.25: R91.1 18.175,-20.525 19.7,-19 23.3,-19 24.663,-20.363 IC1.60
P012: IC1.55
P013: IC1.54
P014: IC1.53
P015: IC1.52
P100: IC1.48
P101: IC1.47
P102: IC1.46
P103: IC1.45
P104: IC1.44 R96.2 | length 9
  F.Cu w0.25: IC1.44 34.308,-25.577 36.428,-23.457 R96.2@40.228,-23.457
P105: IC1.43 R95.2 | length 8.6
  F.Cu w0.25: IC1.43 34.808,-26.077 35.828,-25.057 R95.2@40.228,-25.057
P106: IC1.42
P107: IC1.41
P109: IC1.34 R97.2 | length 12.3
  F.Cu w0.25: IC1.34 38.548,-30.577 v1(38.728,-30.757) ; v1(38.775,-26.97) 38.945,-26.8 R97.2
  B.Cu w0.25: v1(38.728,-30.757) 38.728,-26.857 v1@38.828,-26.857
P110: IC1.35 R98.2 | length 9.3
  F.Cu w0.25: IC1.35 39.308,-30.077 40.228,-29.157 R98.2@40.228,-28.357
P111: IC1.36
P112: IC1.37
P113: IC1.38
P200: IC1.27
P201/MD: IC1.26 R33.1 | length 2.7
  F.Cu w0.25: IC1.26 27.163,-35.317 R33.1
P204: IC1.24
P301: IC1.31
P302: IC1.30
P303: IC1.29
P304: IC1.28
P407: IC1.16
P408: IC1.15
P409: IC1.14
P411: IC1.12
P413: IC1.13
P500: IC1.49
Relay_ADC: C24.2 IC1.50 R43.2 R44.1 | length 54.1
  F.Cu w0.254: R44.1 3.987,-21.133 3.987,-19.343 R43.2 4.162,-19.147 5.053,-19.147 v1(5.1,-19.1) ; v1(5.1,-10.3) 18.576,-10.3 18.676,-10.2 v1(32.2,-10.2) ; IC1.50 29.663,-20.35 32.561,-17.452 33.045,-17.452 33.049,-17.448 33.185,-17.448 33.433,-17.2 33.567,-17.2 33.769,-16.998 34.077,-16.998 34.4,-16.675
  B.Cu w0.254: v1(5.1,-19.1) v1(5.1,-10.3) ; v1(32.2,-10.2) 33.5,-11.5 v1(33.5,-17.2)
RELAY_CAP_ADC: J10.4 R43.1 | length 7
  F.Cu w0.254: R43.1 2.327,-19.408 3.074,-20.155 3.074,-25.896 J10.4
RES: C21.2 IC1.25 J2.5 J3.3 R32.1 SW4.1 | length 42.8
  F.Cu w0.254: IC1.25 26.663,-36.367 27.453,-37.157 27.393,-37.217 27.393,-38.817 R32.1 30.537,-42.3 v1(34.9,-42.3) ; 28.987,-37.3 v1(29.987,-37.3) v1@30,-37.287 ; v1@34.9,-42.327 J3.3
  F.Cu w0.3: v1(35,-46.4) v1(43.4,-46.4) ; J2.5 47.357,-54.457 SW4.1
  B.Cu w0.3: v1(34.9,-42.3) 34.9,-42.354 35,-42.454 v1(35,-46.4) ; v1(43.4,-46.4) 43.428,-46.428 J2.5
RESETb: R96.1 U1.37 | length 43.7
  F.Cu w0.25: R96.1 42.012,-23.113 v3(43.625,-23.113) ; v1(43.7,-45.4) 54.7,-45.4 55.8,-44.3 55.8,-39.401 54.467,-38.068 U1.37
  B.Cu w0.25: v1(43.7,-45.4) 43.7,-39.372 43.7,-23.496
SAVEb: R95.1 U1.36 | length 40.5
  F.Cu w0.25: R95.1 41.952,-24.973 v3(44.417,-24.973) ; v1@44.37,-44.8 54.5,-44.8 55.1,-44.2 55.1,-40.264 53.967,-39.131 U1.36
  B.Cu w0.25: v1(44.37,-44.755) v3@44.37,-25.03
SDI/RXD: R97.1 U1.27 | length 14.2
  F.Cu w0.25: R97.1 41.925,-26.875 42.2,-27.15 42.275,-27.15 42.65,-27.525 42.65,-30.532 47.3,-35.182 U1.27
SDO/TXD: R98.1 U1.28 | length 13.2
  F.Cu w0.25: R98.1 41.925,-30.925 46.682,-35.682 U1.28
"uC CLK": U1.32
User_BTN: IC1.4 R99.2 | length 28.6
  F.Cu w0.25: IC1.4 21.909,-25.077 22.032,-25.2 v1(22.1,-25.2) ; v1(21.9,-49.1) R99.2@25.075,-49.1
  B.Cu w0.25: v1(21.9,-49.1) 21.9,-37.167 22.1,-36.967 v1(22.1,-25.2)
User_LED: IC1.62 R26.1 | length 67.2
  F.Cu w0.254: IC1.62 23.682,-21.67 23.682,-22.984 v1(23.7,-23.002) ; v1(23.8,-51.1) 23.822,-51.122 61.128,-51.122 R26.1
  B.Cu w0.254: v1(23.7,-23.002) 23.7,-26.899 23.323,-27.276 23.323,-50.623 v1(23.8,-51.1)
VFILT: C13.2 C22.1 C28.1 R41.1 U1.9 U1.16 | length 29.3
  F.Cu w0.254: R41.1 54.025,-28.725 53.752,-28.998 53.752,-29.073 53.467,-29.358 U1.16 53.467,-32.032 53.751,-32.316 55.516,-32.316 55.882,-32.682 U1.9
  F.Cu w0.3: U1.9 57.337,-32.682 58.294,-31.725 61.304,-31.725 62.183,-30.847 63.453,-30.847 64.375,-29.925 64.375,-29.9 64.375,-29.875 65.6,-28.65 65.6,-27.75 C22.1@66.7,-26.65
  F.Cu w0.5: C22.1@66.6,-26.8 C22.1@66.65,-26.85 ; C22.1@66.75,-26.7 75.75,-26.7 C28.1@75.8,-26.75
VFILT_ADC: C23.2 IC1.51 R41.2 R42.1 | length 43.8
  F.Cu w0.254: v1(31.3,-20.2) 31.9,-19.6 43.9,-19.6 45.685,-17.815 53.56,-17.815 v1(53.6,-17.775)
  F.Cu w0.3: IC1.51 v1(29.163,-19.987) 32.475,-16.675 32.5,-16.675 ; R42.1@52.5,-27.075 53.95,-27.075 54.1,-27.225 R41.2@54.504,-27.225 ; R41.2 v1(54.1,-26.42)
  B.Cu w0.254: v1(29.163,-19.987) 29.23,-19.987 29.444,-20.2 v1(31.3,-20.2)
  B.Cu w0.3: v1(53.6,-17.775) 53.6,-25.92 v1(54.1,-26.42) 54.1,-26.742
XCLKC: U1.21
XTAL: C9.1 IC1.9 Y1.1 | length 8.2
  F.Cu w0.25: Y1.1@14.508,-26.937 14.508,-26.712 16.163,-25.057 16.328,-25.057 18.848,-27.577 IC1.9
XTAL1: C19.1 U1.35 Y2.1 | length 6.2
  F.Cu w0.25: Y2.1 53.912,-41.072 54.087,-41.247 54.087,-39.887 53.467,-39.267 U1.35
XTAL2: C20.1 U1.34 Y2.3 | length 11.1
  F.Cu w0.25: Y2.3 49.472,-42.972 47.747,-41.247 47.747,-40.52 48.467,-39.8 52.5,-39.8 52.967,-39.333 U1.34
pads on no net: H1.Un1 H2.Un1 H3.Un1 H4.Un1 IC1.6 IC1.7 J3.6 J3.Un1 J3.Un2 J3.Un3 U1.22 U1.39 U2.9 Y1.3 Y1.4 Y2.2 Y2.4

## Polygon pours and split planes (outlines as drawn)
GND on F.Cu "GND_L01_P000" (solid, remove dead copper, pour order 0): -4.4,4.1 -4,3.7 -4,-63.5 96.4,-63.5 96.6,-63.3 95.6,-62.3 95.6,4.3 -4.5,4.3 -4.6,4.2
GND on B.Cu "GND_L02_P001" (solid, remove dead copper, pour order 1): -4.4,4.1 -4,3.7 -4,-63.5 96.4,-63.5 96.6,-63.3 95.6,-62.3 95.6,4.3 -4.5,4.3 -4.6,4.2

## Keep-outs
Keep-Out Layer:
  the board outline again, w0.254

## Other copper
F.Cu:
  pour cut-out: 94.2,-62.3 94.2,-57.6 89.55,-57.6 89.55,-62.3
  pour cut-out: 2.2,-2.3 2.2,2.4 -2.45,2.4 -2.45,-2.3
  text "BY" at -2.1,-61.6 h3
B.Cu:
  pour cut-out: -2.2,-2.3 -2.2,2.4 2.45,2.4 2.45,-2.3
  text "BY" at 1.4,-61.6 h3

## Silkscreen, mask and mechanical layers (free items; w line width, h text height)
F.SilkS:
  text "KNX_MCU_8CH_V1.2" at 78.7,0.5 h3
  text "26.07.2026" at 88.4,-1.1 h2
  text "DIO" at 40.5,-41.2 h0.7
  text "3V3" at 34.2,-41.3 h0.7
  text "RES" at 34,-42.5 h0.7
  text "CLK" at 40.5,-42.5 h0.7
  text "GND" at 34.1,-43.8 h0.7
  text "GND" at 33.5,-52.1 h0.7 r90
  text "DIO" at 41.1,-52.1 h0.7 r90
  text "RES" at 43.64,-52.1 h0.7 r90
  text "3V3" at 35.9,-52.2 h0.7 r90
  text "CLK" at 38.5,-52.2 h0.7 r90
Edge.Cuts:
  circle w0.254: c80.8,-49.8 r1.5
  circle w0.254: c10.8,-54.8 r1.5
  circle w0.254: c10.8,-4.8 r1.5
  circle w0.254: c80.8,-4.8 r1.5
  lines w0.254: -2.45,-62 -2.45,2.4 94.05,2.4 94.05,-62 -2.45,-62

## Text inside footprints (layer, text, board x,y; h text height)
J3: Cmts.User "KEEPOUT" at 37.507,-42.747 h0.4 r90
U1: F.Fab "*" at 56.328,-36.814 h1 r180; F.Fab "*" at 56.328,-36.814 h1 r180; F.SilkS "*" at 57.776,-36.814 h1 r180; F.SilkS "*" at 57.776,-36.814 h1 r180